# EAGLE board AtmoOrb (EAGLE 7.1.0)
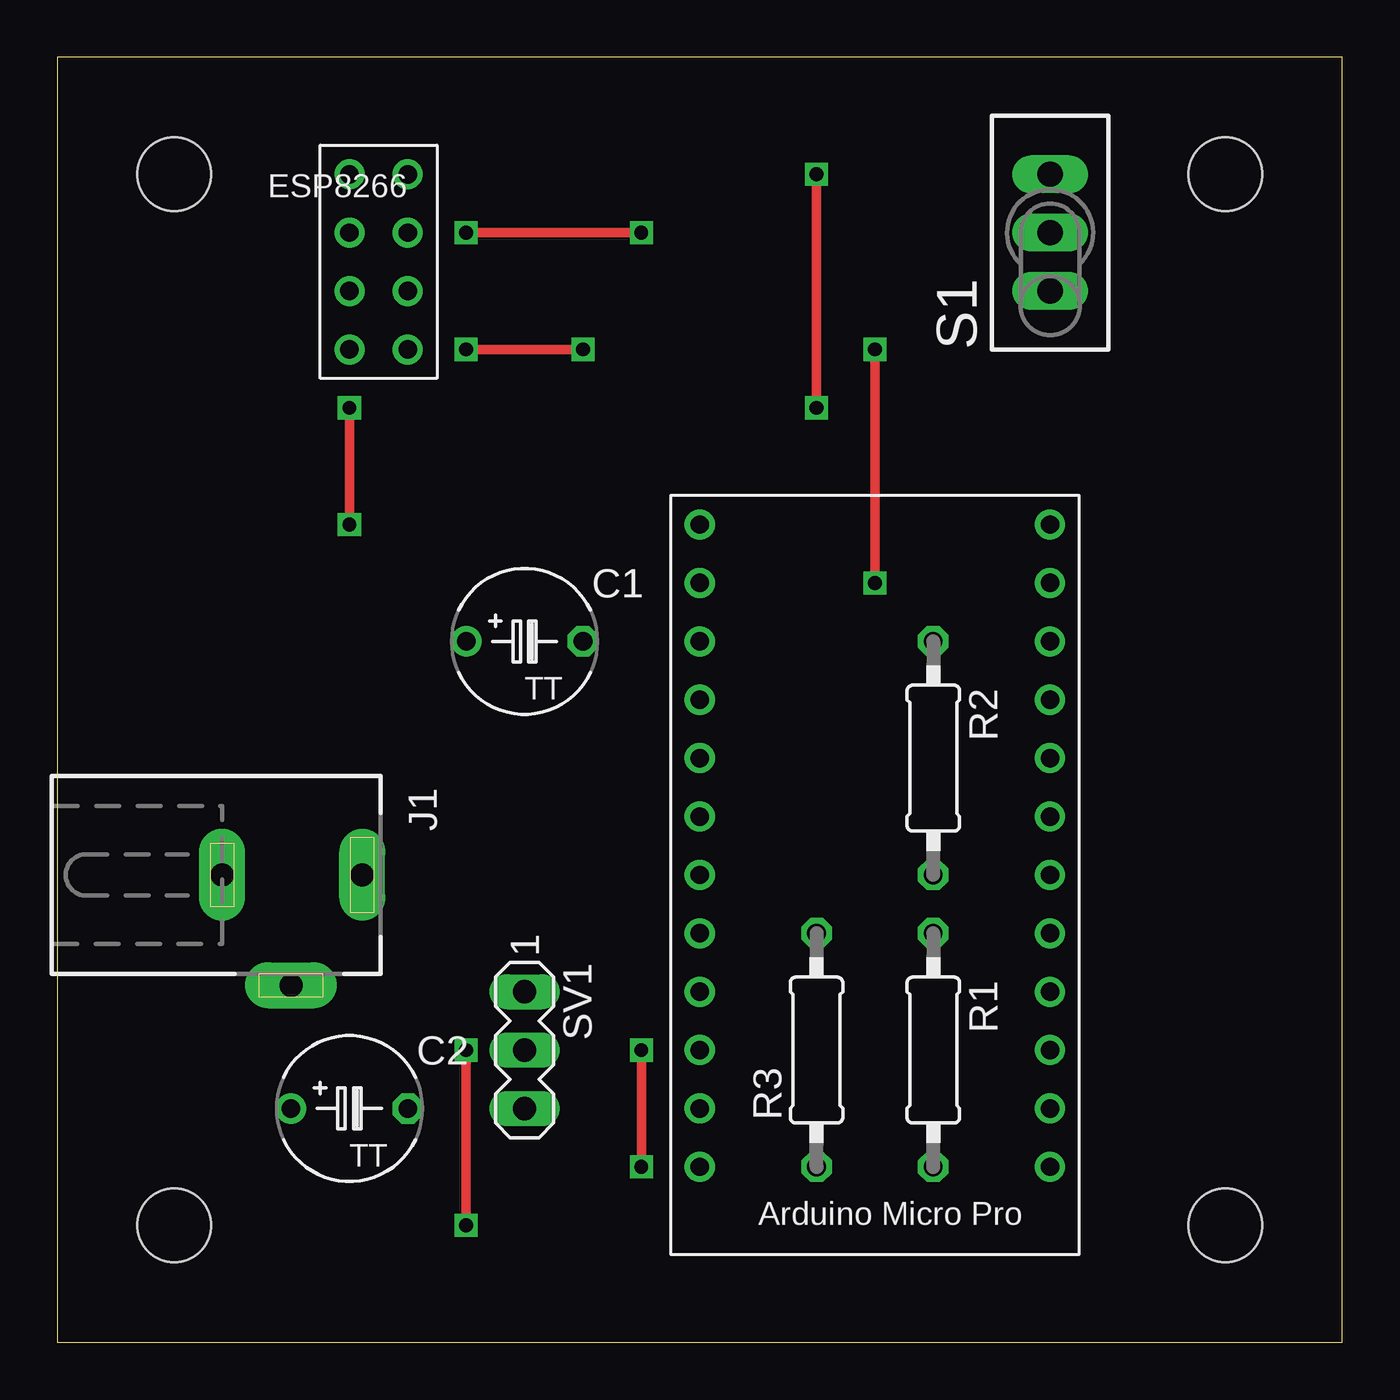
[diagram p0: board, top side]
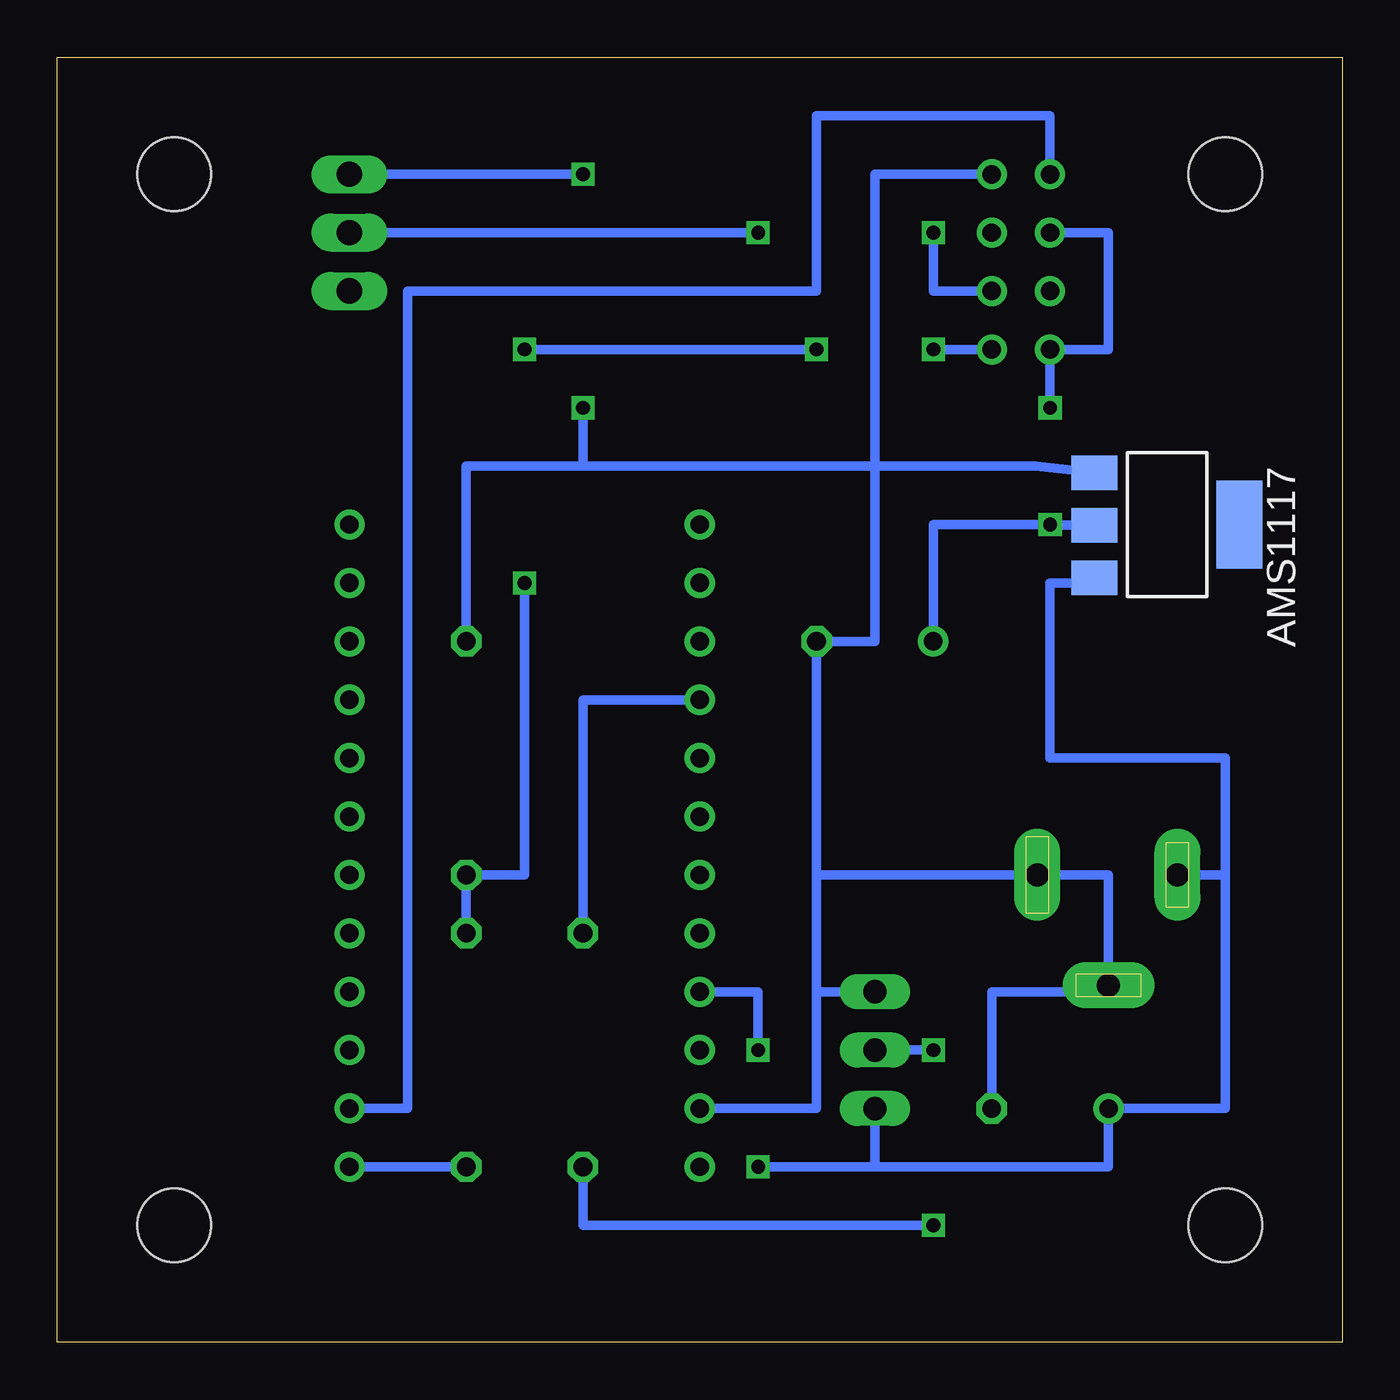
[diagram p1: board, bottom side, seen from below]

Size 55.88 x 55.88 mm. Coordinates in mm from the lower left corner, seen from the top.
Outline: 0,0 55.88,0 55.88,55.88 0,55.88 0,0
Copper layers (1*16): Top 0.035mm / dielectric 1.5mm / Bottom 0.035mm
Design rules "default": minimum track width 10mil, minimum drill 24mil, track to track 8mil, track to pad 8mil, pad to pad 8mil, via to via 8mil, smd to smd 8mil, copper to edge 40mil, drill to drill 8mil, minimum pad ring 10mil, minimum via ring 8mil, stop-mask expansion 4mil, vias tented up to drill 0mil, thermal gap 10mil
Holes 3.2 mm at 50.8,50.8 50.8,5.08 5.08,50.8 5.08,5.08

## Footprints (pad centres in the part's own frame; a part is rotated, then mirrored left to right if it is on the bottom)
SOT223 = smd 1.499 x 2.007: 1 -2.261,-3.15; 2 0.025,-3.15; 3 2.311,-3.15 | smd 3.81 x 2.007: 4 0,3.15
ARDUINO_MICRO_PRO = drill 0.8: 1 0,15.24; 2 2.54,15.24; 3 5.08,15.24; 4 7.62,15.24; 5 10.16,15.24; 6 12.7,15.24; 7 15.24,15.24; 8 17.78,15.24; 9 20.32,15.24; 10 22.86,15.24; 11 25.4,15.24; 12 27.94,15.24; 13 0,0; 14 2.54,0; 15 5.08,0; 16 7.62,0; 17 10.16,0; 18 12.7,0; 19 15.24,0; 20 17.78,0; 21 20.32,0; 22 22.86,0; 23 25.4,0; 24 27.94,0
TAP5-60 = drill 0.813: + -2.54,0 | drill 0.813 octagon: - 2.54,0
ESP8266 = drill 0.8: 1 0,0; 2 2.54,0; 3 5.08,0; 4 7.62,0; 5 0,2.54; 6 2.54,2.54; 7 5.08,2.54; 8 7.62,2.54
DCJ0202 = drill 1 pad 2 long: 1 0,3.1; 2 4.8,0; 3 0,-3
0207/10 = drill 0.813 octagon: 1 -5.08,0; 2 5.08,0
TL3XPO = drill 1.1 pad 1.422 long: 1 -2.54,0; 2 0,0; 3 2.54,0
MA03-1 = drill 1.016 long: 1 -2.54,0; 2 0,0; 3 2.54,0

## Placement (x,y rotation side)
AMS1117  REG1117  [SOT223]  7.62,35.56 270 bottom
ARDUINO-MICRO-PRO  ARDUINO_MICRO_PRO  [ARDUINO_MICRO_PRO]  43.18,7.62 90 top
C1  22uF  [TAP5-60]  20.32,30.48 0 top
C2  [TAP5-60]  12.7,10.16 0 top
ESP8266  ESP8266  [ESP8266]  12.7,50.8 270 top
J1  DCJ0202  [DCJ0202]  10.16,20.32 270 top
R1  1k  [0207/10]  38.1,12.7 270 top
R2  2k  [0207/10]  38.1,25.4 270 top
R3  470  [0207/10]  33.02,12.7 90 top
S1  TL32PO  [TL3XPO]  43.18,48.26 90 top
SV1  [MA03-1]  20.32,12.7 270 top

## Library data of the parts
AMS1117 = burr-brown; MPN: REG1117; OC_FARNELL: 1097566; OC_NEWARK: 14P6981
ARDUINO-MICRO-PRO = ArduinoMicroPro
C1 C2 R1-R3 = rcl
ESP8266 = ESP8266
J1 = con-jack; OC_FARNELL: unknown; OC_NEWARK: unknown
S1 = switch
SV1 = con-lstb; OC_FARNELL: unknown; OC_NEWARK: unknown

## Nets
+3V3: AMS1117.2 C1.+ ESP8266.2 ESP8266.4
+5V: AMS1117.3 ARDUINO-MICRO-PRO.4 C2.+ J1.3 SV1.3
GND: AMS1117.1 ARDUINO-MICRO-PRO.2 C1.- C2.- ESP8266.5 J1.1 J1.2 R2.1 S1.3 SV1.1
N$1: ARDUINO-MICRO-PRO.13 R1.2
N$2: ESP8266.8 R1.1 R2.2
N$3: ARDUINO-MICRO-PRO.14 ESP8266.1
N$4: ARDUINO-MICRO-PRO.9 R3.2
N$5: R3.1 SV1.2
N$6: ESP8266.7 S1.2

## Tracks (layer width: path | path; a pad name or v marks a point on that pad's centre or on a via)
+3V3  (via drill 0.6)
  Top 0.406: v12.7,40.64 v12.7,35.56
  Bottom 0.406: ESP8266.2 10.16,48.26 10.16,43.18 ESP8266.4 v12.7,40.64 | AMS1117.2 12.7,35.53 v12.7,35.56 17.78,35.56 C1.+
+5V  (via drill 0.6)
  Top 0.406: v25.4,12.7 v25.4,7.62
  Bottom 0.406: 20.32,7.62 10.16,7.62 C2.+ 5.08,10.16 5.08,20.32 | SV1.3 20.32,7.62 | ARDUINO-MICRO-PRO.4 25.4,15.24 v25.4,12.7 | v25.4,7.62 20.32,7.62 | 5.08,20.32 J1.3 | 5.08,20.32 5.08,25.4 12.7,25.4 12.7,33.02 10.77,33.02 AMS1117.3
GND  (via drill 0.6)
  Top 0.406: v33.02,50.8 v33.02,40.64
  Bottom 0.406: ARDUINO-MICRO-PRO.2 22.86,10.16 22.86,15.24 | SV1.1 22.86,15.24 | 22.86,15.24 22.86,20.32 | 22.86,20.32 J1.1 10.16,20.32 J1.2 10.16,15.24 15.24,15.24 C2.- | 22.86,20.32 C1.- 20.32,30.48 20.32,38.1 | ESP8266.5 20.32,50.8 20.32,38.1 | 20.32,38.1 13.31,38.1 AMS1117.1 | R2.1 38.1,38.1 33.02,38.1 | 20.32,38.1 33.02,38.1 | S1.3 v33.02,50.8 | v33.02,40.64 33.02,38.1
N$1
  Bottom 0.406: ARDUINO-MICRO-PRO.13 R1.2
N$2  (via drill 0.6)
  Top 0.406: v35.56,33.02 v35.56,43.18 | v22.86,43.18 v17.78,43.18
  Bottom 0.406: R1.1 R2.2 35.56,20.32 v35.56,33.02 | v35.56,43.18 v22.86,43.18 | v17.78,43.18 ESP8266.8
N$3
  Bottom 0.406: ARDUINO-MICRO-PRO.14 40.64,10.16 40.64,45.72 22.86,45.72 22.86,53.34 12.7,53.34 ESP8266.1
N$4
  Bottom 0.406: R3.2 33.02,27.94 ARDUINO-MICRO-PRO.9
N$5  (via drill 0.6)
  Top 0.406: v17.78,12.7 v17.78,5.08
  Bottom 0.406: SV1.2 v17.78,12.7 | v17.78,5.08 33.02,5.08 R3.1
N$6  (via drill 0.6)
  Top 0.406: v17.78,48.26 v25.4,48.26
  Bottom 0.406: ESP8266.7 17.78,45.72 v17.78,48.26 | v25.4,48.26 S1.2

## Text on the board
tNames: ESP8266 | Arduino Micro Pro